# Altium PCB ONTVANGER.PcbDoc
Units mil, origin at the board's own origin, x right, y up, seen from the top; angles counter-clockwise.
Board outline 3200 x 2950 mil, 2 copper layers (Top Layer, Bottom Layer); 52 components, 46 nets, 166 pads, 12 vias.
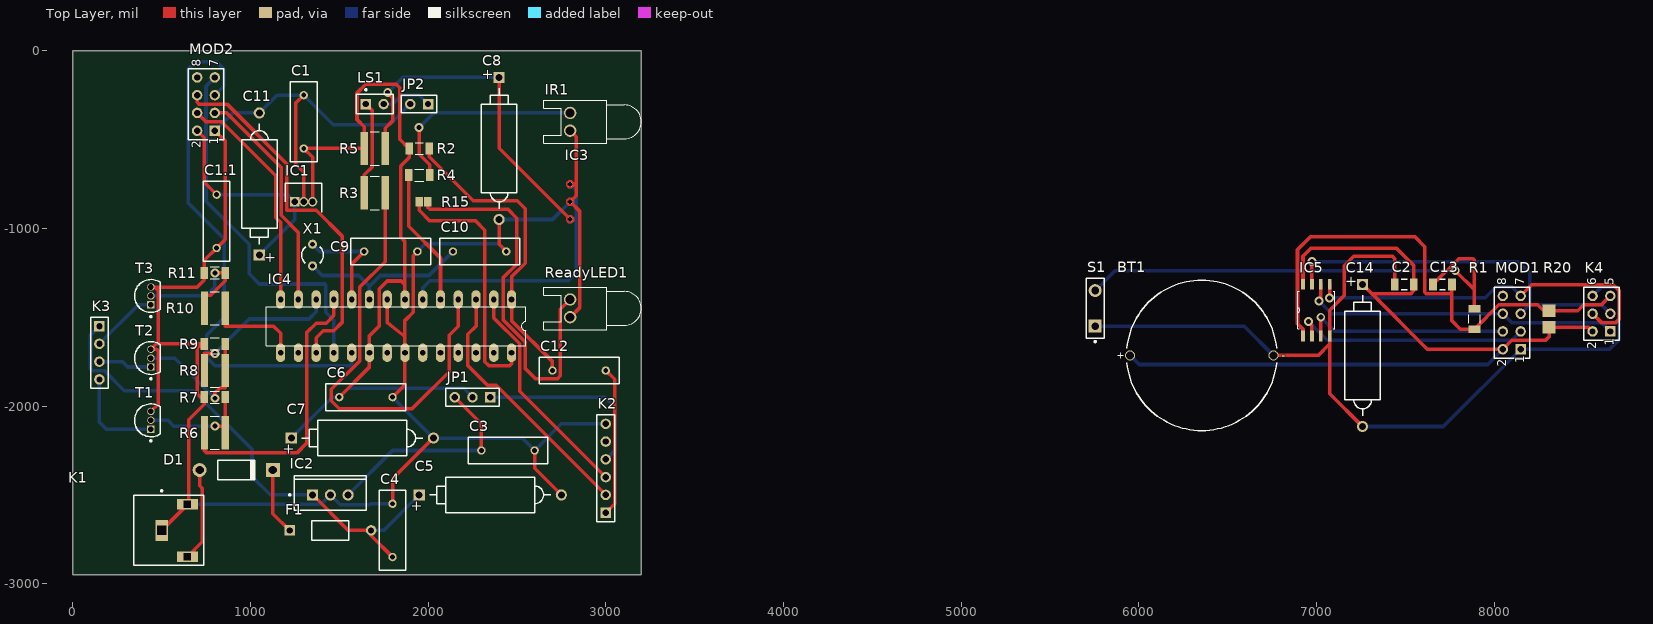
[diagram p0: Top Layer view]
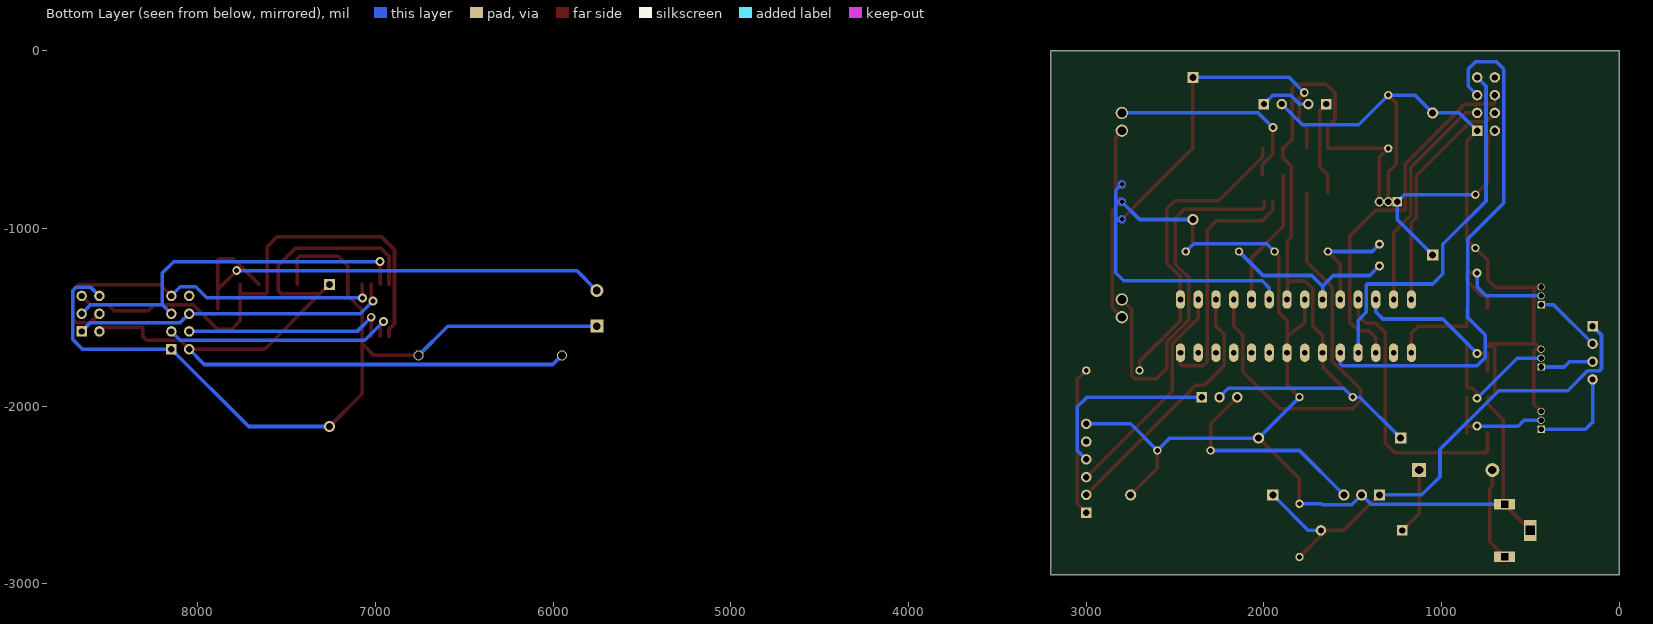
[diagram p1: Bottom Layer view, seen from below]

## Layer stack, top to bottom
Top Solder: solder mask 0.4, Solder Resist, Dk 3.5
Top Layer: signal copper 1.4
Dielectric 1: dielectric 12.6, FR-4, Dk 4.8
Bottom Layer: signal copper 1.4
Bottom Solder: solder mask 0.4, Solder Resist, Dk 3.5

## Board outline
3200,0 3200,-2950 0,-2950 0,0

## Design rules (kind name [scope] priority, off if disabled: settings)
Clearance [All] p1: gap=10 ignorepadtopadclearanceinfootprint=FALSE except(0: Arc-Hole Track-Hole SMDPad-Hole THPad-Hole Via-Hole Fill-Hole Poly-Hole Region-Hole Text-Hole)
PolygonConnect [All] p1: connectstyle=Relief reliefconductorwidth=10 reliefentries=4 polygonreliefangle="90 Angle" airgapwidth=10
RoomDefinition ZENDER [InComponentClass('ZENDER')] p1: confinementstyle=ConfineIn formatcopy=TRUE lockcomponents=FALSE outline 5695,-2160 8715,-2160 8715,-1170 5695,-1170
RoomDefinition ONTVANGER [InComponentClass('ONTVANGER')] p2: confinementstyle=ConfineIn formatcopy=TRUE lockcomponents=FALSE outline 6700,-4130 15305,-4130 15305,-2550 6700,-2550
RoutingVias [All] p1: holewidth=28 width=50 viastyle="Through Hole" minholewidth=28 minwidth=50 maxholewidth=28 maxwidth=50
SolderMaskExpansion [All] p1: expansion=4 istentingtop=FALSE
Width [All] p1: maxlimit=25 minlimit=10 preferedwidth=20 minimp=50.000000 maximp=50.000000 favimp=50.000000
30 further rules are at their usual default settings.

## Classes and differential pairs
component class ZENDER: BT1 C2 C13 C14 IC5 K4 MOD1 R1 R20 S1
component class ONTVANGER: "  " C1 C1.1 C3 C4 C5 C6 C7 C8 C9 C10 C11 C12 D1 F1 IC1 IC2 IC3 IC4 IR1 JP1 JP2 K1 K2 K3 LS1 MOD2 R2 R3 R4 R5 R6 R7 R8 R9 R10 R11 R15 ReadyLED1 T1 T2 T3 X1

## Components (designator, comment, footprint, x,y, rotation, side; value= is the part's Value field where it differs from the comment)
BT1 "CR-2032" PANA-CR-2032HFN 6355,-1715 r0 top
C1 "Cap" RAD-0.3 1300,-400 r270 top value=100n
C1.1 "Cap" RAD-0.3 810,-960 r90 top value=100n
C2 "Cap Semi" C1206 7495,-1315 r0 top value=100nF
C3 "Cap" RAD-0.3 2450,-2250 r180 top value=100n
C4 "Cap" RAD-0.3 1800,-2700 r270 top value=100n
C5 "50v" POLAR0.8 2350,-2500 r180 top value=100u
C6 "Cap" RAD-0.3 1650,-1950 r180 top value=100n
C7 "50v" POLAR0.8 1630,-2180 r180 top value=100u
C8 "50v" POLAR0.8 2400,-550 r90 top value=10u
C9 "Cap" RAD-0.3 1790,-1130 r180 top value=22pp
C10 "Cap" RAD-0.3 2290,-1130 r180 top value=22pp
C11 "50v" POLAR0.8 1050,-750 r270 top value=100u
C12 "Cap" RAD-0.3 2850,-1800 r180 top value=100n
C13 "Cap Semi" C1206 7710,-1315 r0 top value=100nF
C14 "Cap Pol2" POLAR0.8 7260,-1715 r90 top value=100nF
D1 "Diode 1N4007" DO-41 920,-2360 r0 top
F1 "500mAT" PIN-W2/E2.8 1450,-2700 r0 top
IC1 "LP2950-33LPE3" TO127P419X482X788-3P 1250,-850 r0 top
IC2 "MC7805" ONSC-TO-220-3-221AB-01 1450,-2500 r90 top
IC3 "TSOP58238" *TSOP-382_TSOP38238(Primary) 2839.37,-751.57 r270 top
IC4 "ATmega328-PU" *DIL28 1820,-1550 r270 top
IC5 "ATtiny85" *SOIC127P798X216-8N 7000,-1460 r90 top
IR1 "LED2" LED-0 2800,-400 r90 top
JP1 "K1 K2 Power select" HDR1X3 2350,-1950 r180 top
JP2 "Header 2" HDR1X2 2000,-300 r180 top
K1 "PJRAN1X1U01X" SWIT-PJRAN1X1U01X_V 500,-2700 r270 top
K2 "5V FTDI cable" HDR1X6 3000,-2600 r90 top
K3 "Header 4" HDR1X4 150,-1550 r270 top
K4 "ATMEL ISP" HDR2X3 8655,-1580 r90 top
LS1 "8 Ohm" PIN2 1650,-300 r0 top
MOD1 "NRF24L01+" HDR2X4 8150,-1680 r90 top
MOD2 "NRF24L01+" HDR2X4 800,-450 r90 top
R1 "Res2" *RESC3115X70N 7890,-1510 r90 top value=10K
R2 "Res2" *RESC3115X70N 1950,-550 r180 top locked value=10K
R3 "Res2" *RESC3146X60N 1700,-800 r0 top value=120R
R4 "Res2" *RESC3215X64N 1950,-700 r180 top value=2K7
R5 "Res2" *RESC3146X60N 1700,-550 r180 top value=120R
R6 "Res2" *RESC3146X60N 800,-2150 r180 top locked value=120R
R7 "Res2" *RESC3215X64N 800,-1950 r0 top value=12k
R8 "Res2" *RESC3146X60N 800,-1800 r180 top locked value=120R
R9 "Res2" *RESC3215X64N 800,-1650 r0 top value=12k
R10 "Res2" *RESC3146X60N 800,-1450 r0 top value=120R
R11 "Res2" *RESC3215X64N 800,-1250 r0 top value=12k
R15 "Res2" *RESC1412X64N 1973.58,-850 r180 top value=1K
R20 "Res2" *RESC3216X55N 8310,-1510 r90 top value=6k8
ReadyLED1 "LED1" LED-0 2800,-1450 r90 top
S1 "SW-PB" SPST-2 5755,-1450 r90 top
T1 "BS170" ONSC-TO-92-3-29-11 440,-2080 r90 top
T2 "BS170" ONSC-TO-92-3-29-11 440,-1730 r90 top
T3 "BS170" ONSC-TO-92-3-29-11 440,-1380 r90 top
X1 "16MHz" R38 1350,-1150 r180 top

## Footprints (in the part's own frame and the unit in brackets; to place one, negate y for a bottom-side part, rotate by r counter-clockwise, add the part's x,y. Pads: shape width x height; smd on the part's side, far side on the other; paste and mask are expansions set on the pad)
*DIL28 [mil]
  oval 104x52 hole 32: 1(-150,650) 2(-150,550) 3(-150,450) 4(-150,350) 5(-150,250) 6(-150,150) 7(-150,50) 8(-150,-50) 9(-150,-150) 10(-150,-250) 11(-150,-350) 12(-150,-450) 13(-150,-550) 14(-150,-650) 15(150,-650) 16(150,-550) 17(150,-450) 18(150,-350) 19(150,-250) 20(150,-150) 21(150,-50) 22(150,50) 23(150,150) 24(150,250) 25(150,350) 26(150,450) 27(150,550) 28(150,650)
  silkscreen extent -110,-730 110,730
*RESC1412X64N [mm]
  rect 1.06x1.42 smd: 1(-0.599,0) 2(0.599,0)
*RESC3115X70N [mm]
  rect 1.08x1.68 smd: 1(-1.445,0) 2(1.445,0)
  silkscreen extent -0.58,-0.83 0.58,0.83
*RESC3146X60N [mm]
  rect 1.05x4.77 smd: 1(-1.485,0) 2(1.485,0)
  silkscreen extent -0.64,-2.38 0.64,2.38
*RESC3215X64N [mm]
  rect 1.06x1.72 smd: 1(-1.499,0) 2(1.499,0)
  silkscreen extent -0.65,-0.85 0.65,0.85
*RESC3216X55N [mm]
  rect 1.74x1.82 smd: 1(-1.19,0) 2(1.19,0)
*SOIC127P798X216-8N [mil]
  rect 61x21 smd: 1(-146,75) 2(-146,25) 3(-146,-25) 4(-146,-75) 5(146,-75) 6(146,-25) 7(146,25) 8(146,75)
  silkscreen extent -106,-105 106,105
*TSOP-382_TSOP38238(Primary) [mm]
  round 0.7 hole 0.7: GND(2.5,-1) OUT(0,-1) VS(5,-1)
  Top Layer region: 0.568,-0.793 0.255,-0.453 -0.207,-0.432 -0.547,-0.745 -0.568,-1.207 -0.255,-1.547 0.207,-1.568 0.547,-1.255
  Top Layer region: 3.068,-0.793 2.755,-0.453 2.293,-0.432 1.953,-0.745 1.932,-1.207 2.245,-1.547 2.707,-1.568 3.047,-1.255
  Top Layer region: 5.568,-0.793 5.255,-0.453 4.793,-0.432 4.453,-0.745 4.432,-1.207 4.745,-1.547 5.207,-1.568 5.547,-1.255
  Bottom Layer region: 0.568,-0.793 0.255,-0.453 -0.207,-0.432 -0.547,-0.745 -0.568,-1.207 -0.255,-1.547 0.207,-1.568 0.547,-1.255
  Bottom Layer region: 3.068,-0.793 2.755,-0.453 2.293,-0.432 1.953,-0.745 1.932,-1.207 2.245,-1.547 2.707,-1.568 3.047,-1.255
  Bottom Layer region: 5.568,-0.793 5.255,-0.453 4.793,-0.432 4.453,-0.745 4.432,-1.207 4.745,-1.547 5.207,-1.568 5.547,-1.255
  Multi-Layer region: 0.568,-0.793 0.255,-0.453 -0.207,-0.432 -0.547,-0.745 -0.568,-1.207 -0.255,-1.547 0.207,-1.568 0.547,-1.255
  Multi-Layer region: 3.068,-0.793 2.755,-0.453 2.293,-0.432 1.953,-0.745 1.932,-1.207 2.245,-1.547 2.707,-1.568 3.047,-1.255
  Multi-Layer region: 5.568,-0.793 5.255,-0.453 4.793,-0.432 4.453,-0.745 4.432,-1.207 4.745,-1.547 5.207,-1.568 5.547,-1.255
C1206 [mm] "Chip Capacitor, Body 3.2x1.6mm, IPC High Density"
  rect 1.1x1.7 smd: 1(-1.35,0) 2(1.35,0)
  silkscreen extent -0.4,-0.75 0.4,0.75, body extent -1.7,-0.9 1.7,0.9, height 1.3
DO-41 [mm] "Diode, Axial; Body 5.2 x 2.7 mm (LxDia. max), Lead Dia. 0.86 mm (max)"
  round 2 hole 1.2: 1(-5.23,0)
  rect 2x2 hole 1.2: 2(5.23,0)
  silkscreen extent -2.65,-1.4 2.75,1.4
HDR1X2 [mm] "Connector; Header; 2 Position"
  rect 1.5x1.5 hole 0.9: 1(0,0)
  round 1.5 hole 0.9: 2(2.54,0)
  silkscreen extent -1.27,-1.27 3.81,1.27
HDR1X3 [mm] "Connector; Header; 3 Position"
  rect 1.5x1.5 hole 0.9: 1(0,0)
  round 1.5 hole 0.9: 2(2.54,0) 3(5.08,0)
  silkscreen extent -1.27,-1.27 6.35,1.27
HDR1X4 [mm] "Connector; Header; 4 Position"
  rect 1.5x1.5 hole 0.9: 1(0,0)
  round 1.5 hole 0.9: 2(2.54,0) 3(5.08,0) 4(7.62,0)
  silkscreen extent -1.27,-1.27 8.89,1.27
HDR1X6 [mm] "Connector; Header; 6 Position"
  rect 1.5x1.5 hole 0.9: 1(0,0)
  round 1.5 hole 0.9: 2(2.54,0) 3(5.08,0) 4(7.62,0) 5(10.16,0) 6(12.7,0)
  silkscreen extent -1.27,-1.27 13.97,1.27
HDR2X3 [mm] "Connector; Header; 3x2 Position"
  rect 1.5x1.5 hole 0.9: 1(0,0)
  round 1.5 hole 0.9: 2(0,2.54) 3(2.54,0) 4(2.54,2.54) 5(5.08,0) 6(5.08,2.54)
  silkscreen extent -1.27,-1.27 6.35,3.81
HDR2X4 [mm] "Connector; Header; 4x2 Position"
  rect 1.5x1.5 hole 0.9: 1(0,0)
  round 1.5 hole 0.9: 2(0,2.54) 3(2.54,0) 4(2.54,2.54) 5(5.08,0) 6(5.08,2.54) 7(7.62,0) 8(7.62,2.54)
  silkscreen extent -1.27,-1.27 8.89,3.81
LED-0 [mil] "LED; 2 Leads"
  round 70 hole 50: 1(50,0) 2(-50,0)
  silkscreen extent -120,-400 120,150
ONSC-TO-92-3-29-11 [mm] "TO, 3-Leads, Body Dia 4.7mm, Pitch 1.27mm"
  rect 1.05x1.05 hole 0.8: 1(-1.27,0)
  round 1.05 hole 0.8: 2(0,0) 3(1.27,0)
  silkscreen extent -3.07,-1.34 2.35,2.35, body extent -2.35,-1.33 2.36,2.36, height 7.87
ONSC-TO-220-3-221AB-01 [mm] "FM, 3-Leads, Body 10.3x4.85mm, Pitch 2.54mm"
  rect 1.6x1.6 hole 1: 1(0,2.54)
  round 1.6 hole 1: 2(0,0) 3(0,-2.54)
  silkscreen extent -2.19,-5.15 2.72,5.92, body extent -2.16,-5.15 2.69,5.15, height 19.68
PANA-CR-2032HFN [mm] "TH, 2-Leads, Dia 21.5mm"
  round 1.45 hole 1.1: 1(-10.25,0) 2(10.25,0)
  silkscreen extent -10.7,-10.75 10.7,10.75, body extent -10.75,-10.75 10.75,10.75, height 9.9
PIN2 [mm] "Photosensitive Diode; 2 Leads"
  rect 1.5x1.5 hole 0.9: 1(0,0)
  round 1.5 hole 0.9: 2(2.54,0)
  silkscreen extent -1.4,-1.4 3.94,2.17
PIN-W2/E2.8 [mm] "Thru-Hole; 2 Leads"
  rect 1.5x1.5 hole 0.9: 1(-5.825,0)
  round 1.5 hole 0.9: 2(5.825,0)
  silkscreen extent -2.65,-1.4 2.65,1.4
POLAR0.8 [mm] "Polarized Capacitor; 2 Leads"
  rect 1.6x1.6 hole 1: 1(10.16,0)
  round 1.6 hole 1: 2(-10.16,0)
  silkscreen extent -8.64,-2.54 8.64,2.54
R38 [mm] "Crystal, Thru-Hole; 2 Leads; Body 3.1 x 8.2 mm (Dia.xH)"
  round 1.3 hole 0.7: 1(0,1.55) 2(0,-1.55)
  silkscreen extent -1.55,-1.19 1.55,1.17
RAD-0.3 [mm] "Radial Cap, Thru-Hole; 2 Leads; 0.3 in Pin Spacing"
  round 1.2 hole 0.7: 1(-3.81,0) 2(3.81,0)
  silkscreen extent -5.71,-1.91 5.71,1.91
SPST-2 [mm] "Switch; 2 Leads"
  rect 1.85x1.85 hole 1.1: 1(-2.54,0)
  round 1.85 hole 1.1: 2(2.54,0)
  silkscreen extent -4.89,-1.27 4.28,1.27
SWIT-PJRAN1X1U01X_V [mm] "Jack, 3-Leads, Body 19.5x10mm"
  rect 3x1.8 hole 1.3 square paste-1: 1(0,0)
  rect 1.5x3 hole 1 square paste-1: 2(-3.75,3.7) 3(3.75,3.7)
  silkscreen extent -5.77,-4 5,6, body extent -5,-13.5 5,6, height 13
TO127P419X482X788-3P [mm]
  rect 1.35x1.35 hole 0.9: 1(0,0)
  round 1.35 hole 0.9: 2(1.27,0) 3(2.54,0)
  silkscreen extent -1.34,-1.52 3.88,2.67, body extent -1.14,-1.52 3.68,2.67, height 7.37

## Part data
BT1: library part CMP-2000-05296-1, "Coin Cell Battery, 225 mAh, 0.2 mA, 3 V, -30 to 60 degC, Bulk", Battery Capacity=220mAh, Battery Voltage=3V, Manufacturer=Panasonic, Battery IEC Code=CR2032, Battery NEDA Code=5004LC, Battery Size Code=2032, Battery Technology=LithiumManganeseDioxide, Battery Terminals=PCBPins, Datasheet URL=https://datasheet.ciiva.com/3/aaa4000de87-3072.pdf, Datasheet Version="Rev. 0, 05/2010", External Depth=-, External Diameter=20mm, External Height=3.2mm, External Width=-, Manufacturer URL=http://www.panasonic.com/, Product Range=-, SVHC=1,2-dimethoxyethane,ethyleneglycoldimethylether(EGDME)(15-Jun-2015), Weight=2.9g
C1 C1.1 C3 C4 C6 C9 C10 C12: "Capacitor", LatestRevisionDate=17-Jul-2002, LatestRevisionNote="Re-released for DXP Platform.", PackageDescription="Radial Cap, Thru-Hole; 2 Leads; 0.3 in Pin Spacing", PackageReference=RAD-0.3, Published=8-Jun-2000, Publisher="Altium Limited"
C2 C13: "Capacitor (Semiconductor SIM Model)", LatestRevisionDate=29-May-2009, LatestRevisionNote="IPC-7351 Footprint Added.", PackageDescription="Chip Capacitor", PackageReference=C1206, Published=8-Jun-2000, Publisher="Altium Limited"
C5 C7 C8 C11: library part "Cap Pol2", "Polarized Capacitor (Axial)", LatestRevisionDate=17-Jul-2002, LatestRevisionNote="Re-released for DXP Platform.", PackageDescription="Polarized Capacitor; 2 Leads", PackageReference=POLAR0.8, Published=8-Jun-2000, Publisher="Altium Limited"
C14: "Polarized Capacitor (Axial)", LatestRevisionDate=17-Jul-2002, LatestRevisionNote="Re-released for DXP Platform.", PackageDescription="Polarized Capacitor; 2 Leads", PackageReference=POLAR0.8, Published=8-Jun-2000, Publisher="Altium Limited"
D1: "1 Amp General Purpose Rectifier", Code_JEDEC=DO-204-AL, ComponentLink1Description="Manufacturer Link", ComponentLink1URL=http://www.fairchildsemi.com/, ComponentLink2Description=Datasheet, ComponentLink2URL=http://www.fairchildsemi.com/ds/1N%2F1N4001.pdf, DatasheetVersion=1998, LatestRevisionDate=17-Jul-2002, LatestRevisionNote="Re-released for DXP Platform.", PackageDescription="Diode, Axial; Body 5.2 x 2.7 mm (LxDia. max), Lead Dia. 0.86 mm (max)", PackageReference=DO-41, PackageVersion=Aug-1999, Published=8-Jun-2000, Publisher="Altium Limited"
F1: library part "Fuse 1", "Fuse", LatestRevisionDate=17-Jul-2002, LatestRevisionNote="Re-released for DXP Platform.", PackageDescription="Thru-Hole; 2 Leads", PackageReference=PIN-W2/E2.8, Published=8-Jun-2000, Publisher="Altium Limited"
IC1: "Integrated Circuit", Manufacturer_Name="Texas Instruments", Mouser Part Number=595-LP2950-33LPE3, RS Part Number=7620430P, Datasheet Link=http://www.ti.com/lit/gpn/lp2950, Height=4.19mm, Manufacturer_Part_Number=LP2950-33LPE3, Mouser Price/Stock=https://www.mouser.com/Search/Refine.aspx?Keyword=595-LP2950-33LPE3, RS Price/Stock=http://uk.rs-online.com/web/p/products/7620430P
IC2: library part CMP-2000-04928-1, "Positive Voltage Regulator, 1 A, 5 V, 0 to 125 degC, 3-Pin TO-220, RoHS, Tube", Current, Output, Maximum=1A, Current, Quiescent Supply=6.5mA, Current, Supply=3.2mA, Dropout Voltage=2V, Manufacturer="ON Semiconductor", Package Description="3-Pin Flange Mount, Vertical Straight Lead, Body 9.97 x 4.445 mm, Pitch 2.54 mm", Package Reference=TO-220-3-221AB-01, Package Type=TO-220, Package Version="Rev. A, 11/2010", Resistance, Thermal, Junction to Case=5degC/W, Temperature, Operating, Maximum=+125degC, Temperature, Operating, Minimum=0degC, Temperature, Operating, Range=0to+125degC, Voltage, Input Range=Maximumof35V, Voltage, Input, High Level=35V, Voltage, Noise=10μV/V, Voltage, Output=5V, Datasheet URL=http://www.onsemi.com/pub_link/Collateral/MC7800-D.PDF, Datasheet Version="Rev. 27, 11/2014", Dimensions=10.28x4.82x15.75mm, Dropout Voltage Measurement Current=1A, Height=15.75mm, Length=10.28mm, Line Regulation=20mV, Load Regulation=25mV, Manufacturer URL=http://www.onsemi.com/, Mounting Type=ThroughHole, Number of Outputs=1, Number of Pins=3, Output Type=Fixed, Polarity=Positive, Regulation, Line=0.5mV, Regulation, Load=1.3mV, Regulator Function=Standard, Regulator Type=PositiveVoltageOut, Type=VoltageRegulator, Voltage, Dropout=2V, Voltage, Supply=35V, Width=4.82mm
IC3: library part CMP-1666-00022-1, "IR Receiver Modules for Remote Control System, 2.5 to 5.5 V, -25 to 85 degC, 3-Pin THD, RoHS, Bulk", Capacitance="1.8E-11 f", Frequency="24 MHz", Frequency Tolerance=30ppm, Load Capacitance="18 pF", Manufacturer=Vishay, Max Operating Temperature=70degC, Max Supply Voltage=5.5V, Min Operating Temperature=-20degC, Min Supply Voltage=2.5V, Nominal Supply Current=700uA, Package Quantity=1000, Resistance="40 Ohm", Category=Diodes, ComponentLink1Description="Manufacturer URL", ComponentLink1URL=http://www.vishay.com/, ComponentLink2Description=Datasheet, ComponentLink2URL=http://www.vishay.com/docs/82491/tsop382.pdf, ComponentLink3Description=https://datasheet.ciiva.com/15272/tsop582-15272159.pdf?src-supplier=Arrow+Europe, ComponentLink3URL=https://datasheet.ciiva.com/15272/tsop582-15272159.pdf?src-supplier=Arrow+Europe, ComponentLink4Description=https://datasheet.ciiva.com/8078/tsop582-8078165.pdf?src-supplier=Element14, ComponentLink4URL=https://datasheet.ciiva.com/8078/tsop582-8078165.pdf?src-supplier=Element14, ComponentLink5Description=https://datasheet.ciiva.com/8084/tsop582-8084506.pdf?src-supplier=Avnet, ComponentLink5URL=https://datasheet.ciiva.com/8084/tsop582-8084506.pdf?src-supplier=Avnet, ComponentLink6Description=https://datasheet.ciiva.com/29167/geninfo-29167706.pdf?src-supplier=Digi-Key, ComponentLink6URL=https://datasheet.ciiva.com/29167/geninfo-29167706.pdf?src-supplier=Digi-Key, DatasheetVersion="Rev. 1.5, 07/2016", ESR="40 Ohm", Height="0.041 inch", Lead Free="Lead Free", Length="0.197 inch", Manufacturer Part Number=TSOP58238, Mount="Surface Mount", Number of Pins=3, Operating Supply Current=700uA, Orientation="Side View", PackageDescription="3-Pin Through Hole Device, Body 5.00 x 4.80 mm, Pitch 2.54 mm", PackageReference=VISH-TSOP38238, Packaging="Tape and Reel", Pins=4, Pricing 1="1=0,95000, 10=0,83700, 25=0,75600, 100=0,66150, 250=0,58052, 500=0,51300, 1000=0,40500, 5000=0,35910, 10000=0,34425 (USD)", REACH SVHC="No SVHC", RoHS=Yes, RoHSCompliant=True, Sensing Distance=40m, Stock 1=1485, Supplier 1=Digi-Key, Tolerance=30ppm, Width="0.126 inch"
IC4: library part CMP-0095-00015-2, "8-bit AVR Microcontroller, 32KB Flash, 1KB EEPROM, 2KB SRAM, 28-pin PDIP, Industrial Grade (-40°C to 85°C)", Manufacturer="Microchip / Atmel", Manufacturer Part Number=ATMEGA328-PU, ComponentLink1Description="Manufacturer URL", ComponentLink1URL=http://www.atmel.com/, ComponentLink2Description="ATmega48A/48PA/88A/88PA/168A/168PA/328/328P Datasheet", ComponentLink2URL=http://www.atmel.com/dyn/resources/prod_documents/8271.pdf, ComponentLink3Description="ATmega48A/48PA/88A/88PA/168A/168PA/328/328P Summary", ComponentLink3URL=http://www.atmel.com/dyn/resources/prod_documents/8271S.pdf, DatasheetVersion="revD, May-2011", PackageDescription="28-lead (0.300\"/7.62mm Wide) Plastic Dual Inline Package (PDIP)", PackageReference=28P3, PackageVersion="revB, Sep-2001", RevisionNote="DatasheetVersion updated. URLs added."
IC5: library part CMP-0093-00032-2, "8-bit AVR Microcontroller, 20MHz, 2.7-5.5V, 8K Flash, 512 Bytes EEPROM, 512 Bytes SRAM, Industrial Grade (-40°C to 85°C), 8-Lead PDIP, Pb-Free", Manufacturer="Microchip / Atmel", Manufacturer Part Number=ATTINY85-20PU, Code_JEDEC=MS-001-BA, ComponentLink1Description="Manufacturer URL", ComponentLink1URL=http://www.atmel.com/, ComponentLink2Description="ATtiny25/45/85 Datasheet", ComponentLink2URL=http://www.atmel.com/dyn/resources/prod_documents/doc2586.pdf, ComponentLink3Description="ATtiny25/45/85 Summary", ComponentLink3URL=http://www.atmel.com/dyn/resources/prod_documents/2586S.pdf, DatasheetVersion="revN, Apr-2011", PackageDescription="8-Lead, 0.300\" Wide Body, Plastic Dual In-Line Package (PDIP)", PackageReference=8P3, PackageVersion="revB, Jan-2002", RevisionNote="DatasheetVersion updated. URLs added."
IR1 ReadyLED1: library part LED0, "Typical INFRARED GaAs LED", LatestRevisionDate=08-Jul-2005, LatestRevisionNote="Mech Layer 1 removed.", PackageDescription="LED; 2 Leads", PackageReference=LED-0, Published=8-Jun-2000, Publisher="Altium Limited"
JP1: library part "Header 3", "Header, 3-Pin", LatestRevisionDate=17-Jul-2002, LatestRevisionNote="Re-released for DXP Platform.", Publisher="Altium Limited"
JP2: "Header, 2-Pin", LatestRevisionDate=17-Jul-2002, LatestRevisionNote="Re-released for DXP Platform.", Publisher="Altium Limited"
K1: library part CMP-1772-00003-1, "Female Phono Jack, 3 Position, Height 13 mm, Tail Length 4 mm, RoHS, Bulk", Capacitance="100 nF", Case\Package=Radial, Max Operating Temperature="125 degC", Min Operating Temperature="-55 degC", Package Quantity=500, Tolerance=10%, Type (Capacitors)=X7R, Voltage Rating="50 V", ComponentLink1Description="Manufacturer URL", ComponentLink1URL=http://www.switchcraft.com/, ComponentLink2Description=Datasheet, ComponentLink2URL=http://www.conxall.com/Drawings/pjran1x1u__x_series_cd.pdf, DatasheetVersion="Rev. A, 01/2006", Height="3.18 mm", Lead Pitch="2.54 mm", Length="6.6 mm", Mount="Through Hole", PackageDescription="Female Phono Jack, 3 Position, Height 13 mm, Tail Length 4 mm", PackageReference=PJRAN1X1U01X, Packaging=Bulk, Pins=2, Radiation Hardening=No, REACH SVHC="No SVHC", RoHSCompliant=true, Voltage Rating (DC)="50 V", Width="5.08 mm"
K2: library part "Header 6", "Header, 6-Pin", LatestRevisionDate=17-Jul-2002, LatestRevisionNote="Re-released for DXP Platform.", Publisher="Altium Limited"
K3: "Header, 4-Pin", LatestRevisionDate=17-Jul-2002, LatestRevisionNote="Re-released for DXP Platform.", Publisher="Altium Limited"
K4: library part "Header 3X2", "Header, 3-Pin, Dual row", LatestRevisionDate=17-Jul-2002, LatestRevisionNote="Re-released for DXP Platform.", Publisher="Altium Limited"
LS1: library part Speaker, "Loudspeaker", LatestRevisionDate=17-Jul-2002, LatestRevisionNote="Re-released for DXP Platform.", PackageReference=PIN2, Published=24-Mar-1999, Publisher="Altium Limited"
MOD1 MOD2: library part "Header 4X2", "Header, 4-Pin, Dual row", LatestRevisionDate=17-Jul-2002, LatestRevisionNote="Re-released for DXP Platform.", Publisher="Altium Limited"
R1 R2 R3 R4 R5 R6 R7 R8 R9 R10 R11 R15 R20: "Resistor", LatestRevisionDate=17-Jul-2002, LatestRevisionNote="Re-released for DXP Platform.", PackageDescription="Axial Device, Thru-Hole; 2 Leads; 0.4 in Pin Spacing", PackageReference=AXIAL-0.4, Published=8-Jun-2000, Publisher="Altium Limited"
S1: "Switch", LatestRevisionDate=17-Jul-2002, LatestRevisionNote="Re-released for DXP Platform.", PackageDescription="Switch; 2 Leads", PackageReference=SPST-2, Published=24-Mar-1999, Publisher="Altium Limited"
T1 T2 T3: library part CMP-1058-00929-1, "Small Signal MOSFET, 500 mA, 60 V, N-Channel, 3-Pin TO-92, Bulk Box", Manufacturer="On Semiconductor", Package Type=TO-92, Channel Polarity="N Channel", ComponentLink1Description="Manufacturer URL", ComponentLink1URL=http://www.onsemi.com/, ComponentLink2Description=Datasheet, ComponentLink2URL=http://www.onsemi.com/pub_link/Collateral/BS170-D.PDF, ComponentLink3Description="Package Specification", ComponentLink3URL=http://www.onsemi.cn/pub_link/Collateral/2N6426-D.PDF, Configuration=Single, DatasheetVersion="Rev. 6", ID Max (A)=0.5, Mounting Technology="Through Hole", PackageDescription="3-Pin Transistor Outline, Body 4.825 x 3.685 mm, Pitch 1.27 mm", PackageReference=TO-92-3-29-11_AM_SL, PackageVersion="Rev. AM", Packing="Bulk Box", PartNumber=BS170, PD Max (W)=0.35, V(BR)DSS Min (V)=60, VGS Max (V)=20, VGS(th) Max (V)=3
X1: library part XTAL, "RALTRON - AS-16.000-18 - CRYSTAL, 16MHZ, 18PF, HC-49S", ESR (Equivalent Series Resistance)=40R, Frequency Stability=50ppm, Load Capacitance=18pF, Manufacturer="Raltron Electronics", Manufacturer Part Number=AS-16.000-18, Max Operating Temperature=70°C, Min Operating Temperature=-20°C, Category=Crystals, ComponentLink1Description=https://datasheet.ciiva.com/46643/70417478-46643322.pdf?src-supplier=Allied+Electronics, ComponentLink1URL=https://datasheet.ciiva.com/46643/70417478-46643322.pdf?src-supplier=Allied+Electronics, Frequency=16MHz, Frequency Tolerance=50ppm, Height=3.5mm, LatestRevisionDate=17-Jul-2002, LatestRevisionNote="Re-released for DXP Platform.", Length=11.35mm, Mount="Through Hole", Number of Pins=2, PackageDescription="Crystal, Thru-Hole; 2 Leads; Body 3.1 x 8.2 mm (Dia.xH)", PackageReference=R38, Pricing 1="1=0,66000, 10=0,55000, 50=0,49500, 100=0,44000, 500=0,41800, 1000=0,35200, 2500=0,33000, 5000=0,31900, 10000=0,30800 (USD)", Published=8-Jun-2000, Publisher="Altium Limited", REACH SVHC="No SVHC", RoHS=Yes, Series Resistance=40R, Stock 1=1917, Supplier 1=Digi-Key, Width=5mm

## Via types
v1: diameter 50, hole 28, Top Layer to Bottom Layer, 12 vias

## Nets (pads, with @x,y where several pads share a name; then routed paths per layer and width w, separated by ;. In a path a pad name is that pad's centre, name@x,y a point inside that pad or via, vN(x,y) a via of type N, cw(c..) or ccw(c..) an arc to the next point about the centre after c; other vN are vias at no path point)
12V: C4.2 C5.1 F1.2 IC2.1 K3.1 | length 2860.7
  Top Layer w20: IC2.1 1550,-2700 F1.2 1679.33,-2729.33 C4.2
  Bottom Layer w20: K3.1 100,-1600 100,-1790 110,-1800 177,-1800 290,-1913 679,-1913 1009,-2243 1009,-2397 1112,-2500 IC2.1 ; F1.2 1750,-2700 C5.1
+3V3: C1.1.2 C11.1 IC1.1 MOD2.2 | length 1245
  Top Layer w20: MOD2.2 740,-490 740,-740 C1.1.2
  Bottom Layer w20: C1.1.2 1210,-810 IC1.1 1250,-950 C11.1
+5V: C1.2 C6.2 C7.1 IC1.3 IC4.7 IC4.20 JP1.2 R2.2 R5.2 | length 4534.7
  Top Layer w20: IC1.3 1350,-600 C1.2 R5.2 1641.54,-428.54 1600,-387 1600,-238 1650,-188 1820,-188 1841,-209 1841,-497.89 R2.2 1893.11,-602 1846,-649.11 1846,-1050 1870,-1074 1870,-1316 ; C6.2 1670,-1780 IC4.20 1670,-1604 1724,-1550 1724,-1342 1770,-1296 1850,-1296 1870,-1316 ; IC4.7 1870,-1316
  Bottom Layer w20: C7.1 1460,-1950 C6.2 1550,-1900 2200,-1900 JP1.2
GND: C1.1 C1.1.1 C3.1 C4.1 C5.2 C6.1 C7.2 C8.2 C9.1 C10.1 C11.2 IC1.2 IC2.2 IC3.GND IC4.8 IC4.22 IR1.2 JP2.2 K1.1 K1.2 K2.6 MOD2.1 R7.1 R9.1 R11.1 ReadyLED1.2 T1.3 T2.3 T3.3 | length 12232.8
  Top Layer w20: T1.3 481,-1989 481,-1690 471,-1680 T2.3 470,-1650 ; T3.3 461,-1330 ; K1.1 645.67,-2554.33 K1.2 653,-2552.36 653,-2076.98 740.98,-1989 R7.1 720,-1950 700,-1930 700,-1673 710,-1663 740.98,-1663 R9.1 470,-1650 ; MOD2.1 858,-508 858,-1062 C1.1.1 740.98,-1179.02 R11.1 740.98,-1290 700.98,-1330 461,-1330 ; IC1.2 1300,-682.5 1256,-638.5 1256,-294 C1.1 ; IC4.8 1770,-1530 1870,-1610 ; C4.1 1800,-2410 C7.2 ; C6.1 1870,-1880 IC4.22 1870,-1610 ; C9.1 1916,-1154 1916,-1472 1870,-1518 1870,-1610 ; C8.2 2400,-1090 C10.1 ; C3.1 2600,-2350 C5.2 ; ReadyLED1.2 2855,-1445 2855,-905 IC3.GND 2834,-816 2834,-484 IR1.2 ; 461,-1330 481,-1350 481,-1639 470,-1650
  Bottom Layer w20: K1.2 1397.64,-2552.36 IC2.2 1506,-2556 1672,-2556 1678,-2550 C4.1 ; MOD2.1 900,-350 C11.2 1150,-250 C1.1 1466,-416 1784,-416 JP2.2 ; C6.1 C7.2 2530,-2180 C3.1 2750,-2100 K2.6 ; C9.1 1984,-1086 2396,-1086 C10.1 ; C8.2 2700,-950 IC3.GND
NetBT1_1: BT1.1 C2.2 C14.1 IC5.8 K4.2 MOD1.2 R20.1 | length 4915.7
  Top Layer w20: IC5.8 6925,-1157 6970,-1112 7451.15,-1112 7548.15,-1209 C2.2 7548.15,-1350.85 7530,-1369 7314,-1369 ; C14.1 7314,-1369 ; K4.2 8531.85,-1556.85 R20.1 8310,-1610 8290,-1630 8100,-1630 MOD1.2 7625,-1680 7314,-1369
  Bottom Layer w20: BT1.1 6002.46,-1766 7964,-1766 MOD1.2
NetBT1_2: BT1.2 C2.1 C14.2 IC5.4 K4.6 MOD1.1 S1.1 | length 4990
  Top Layer w20: BT1.2 7010,-1715 7075,-1650 ; C14.2 7075,-1930 7075,-1650 ; C2.1 7441.85,-1170 7428.85,-1157 7210,-1157 7157,-1210 7157,-1378 7075,-1460 IC5.4 7075,-1650
  Bottom Layer w20: S1.1 6593.54,-1550 BT1.2 ; C14.2 7715,-2115 MOD1.1 8650,-1680 8705,-1625 8705,-1350 8685,-1330 8605,-1330 K4.6
NetC3_2: C3.2 IC2.3 JP1.3 | length 1215.7
  Top Layer w20: JP1.3 2300,-2100 C3.2
  Bottom Layer w20: IC2.3 1800,-2250 C3.2
NetC8_1: C8.1 IC3.VS R5.1 | length 1969.1
  Top Layer w20: R5.1 1758.46,-436.54 1800,-395 1800,-263 v1(1773,-236) ; C8.1 2400,-548.42 IC3.VS
  Bottom Layer w20: v1(1773,-236) 1859,-150 C8.1
NetC9_2: C9.2 IC4.10 X1.2 | length 606
  Top Layer w20: IC4.10 1570,-1200 C9.2
  Bottom Layer w20: X1.2 1391.02,-1130 C9.2
NetC10_2: C10.2 IC4.9 X1.1 | length 993
  Bottom Layer w20: X1.1 1403.98,-1265 1610,-1265 1670,-1325 ; IC4.9 1670,-1325 ; C10.2 2005,-1265 1730,-1265 1670,-1325
NetC12_1: C12.1 K2.1 | length 841.4
  Top Layer w20: K2.1 3050,-2550 3050,-1850 C12.1
NetC12_2: C12.2 IC4.1 R2.1 | length 1745.6
  Top Layer w20: R2.1 2006.89,-596.89 2255,-845 2502,-845 2547,-890 2547,-1196 2470,-1273 IC4.1 2470,-1519 2700,-1749 C12.2
NetC13_1: C13.1 R1.2 S1.2 | length 2797.5
  Top Layer w20: C13.1 7801.85,-1170 7881.55,-1170 7890,-1178.45 7890,-1346 ; v1(7782,-1238) 7890,-1346 ; R1.2 7890,-1346
  Bottom Layer w20: S1.2 5867,-1238 v1(7782,-1238)
NetC13_2: C13.2 IC5.1 K4.5 R1.1 R20.2 | length 2908.4
  Top Layer w20: IC5.1 6925,-1568 6894,-1537 6894,-1121 6969,-1046 7553,-1046 7610,-1103 7610,-1359 7620,-1369 7750,-1369 7763.15,-1355.85 ; C13.2 7763.15,-1355.85 ; K4.5 8605,-1430 8505,-1430 8471.85,-1463.15 R20.2 8280.15,-1463.15 8247,-1430 8026.89,-1430 R1.1 7810,-1566.89 7763.15,-1520.04 7763.15,-1355.85
NetD1_1: D1.1 K1.3 | length 528.3
  Top Layer w20: K1.3 729,-2764.31 729,-2464 714.09,-2449.09 D1.1
NetD1_2: D1.2 F1.1 | length 379.3
  Top Layer w20: D1.2 1125.91,-2605.24 F1.1
NetIC3_OUT: IC3.OUT IC4.6 | length 1476.7
  Bottom Layer w20: IC4.6 1970,-1335 2010,-1295 2789,-1295 2834,-1250 2834,-785.57 IC3.OUT
NetIC4_2: IC4.2 K2.3 | length 1261
  Top Layer w20: IC4.2 2370,-1504 2516,-1650 2516,-1916 K2.3
NetIC4_3: IC4.3 K2.2 | length 1468.6
  Top Layer w20: IC4.3 2270,-1550 2224,-1596 2224,-1772 2335,-1883 2383,-1883 K2.2
NetIC4_4: IC4.4 R3.2 | length 2490.6
  Top Layer w20: R3.2 1758.46,-1187.54 1616,-1330 1616,-1746 1456,-1906 1456,-1970 1501,-2015 1910,-2015 2119,-1806 2119,-1601 2170,-1550 IC4.4
NetIC4_5: IC4.5 R4.2 | length 774.2
  Top Layer w20: R4.2 1890.98,-988 2070,-1167.02 IC4.5
NetIC4_11: IC4.11 R6.2 | length 1609.8
  Top Layer w20: R6.2 741.54,-2250 755.54,-2264 1262,-2264 1316,-2210 1316,-1587 1370,-1533 1427,-1533 1470,-1490 IC4.11
NetIC4_12: IC4.12 R8.2 | length 891.4
  Top Layer w20: R8.2 741.54,-1704 v1(800,-1704)
  Bottom Layer w20: v1(800,-1704) 994,-1510 1330,-1510 1370,-1470 IC4.12
NetIC4_13: IC4.13 MOD2.3 | length 1283.5
  Top Layer w20: MOD2.3 866.27,-350 1173.42,-657.16 1173.42,-926.58 1270,-1023.15 IC4.13
NetIC4_14: IC4.14 MOD2.4 | length 1297.1
  Top Layer w20: MOD2.4 750,-400 839.53,-400 1143.42,-703.9 1143.42,-939.42 1170,-966 IC4.14
NetIC4_15: IC4.15 R10.2 | length 538.1
  Top Layer w20: R10.2 858.46,-1550 1130,-1550 1170,-1590 IC4.15
NetIC4_17: IC4.17 MOD2.6 | length 2073.8
  Top Layer w20: MOD2.6 700,-290 710,-300 868,-300 1203.42,-635.42 1203.42,-897 1370,-897 1516,-1043 1516,-1530 1470,-1576 1410,-1576 1370,-1616 IC4.17
NetIC4_18: IC4.18 MOD2.7 | length 2084.5
  Bottom Layer w20: MOD2.7 750,-200 750,-847 993,-1090 993,-1256 1050,-1313 1418,-1313 1424,-1319 1424,-1472 1470,-1518 IC4.18
NetIC4_19: IC4.19 MOD2.5 | length 3050.1
  Bottom Layer w20: MOD2.5 850,-200 850,-103 810,-63 690,-63 650,-103 650,-857 854,-1061 854,-1501 755,-1600 755,-1727 800,-1772 1560,-1772 1570,-1762 IC4.19
NetIC4_28: IC4.28 R15.2 | length 1429.6
  Top Layer w20: R15.2 1950,-898 2010,-958 2268,-958 2320,-1010 2320,-1750 2342,-1772 2460,-1772 2470,-1762 IC4.28
NetIC5_2: IC5.2 MOD1.3 | length 1351.3
  Top Layer w20: v1(6955,-1523) 6975,-1543 IC5.2
  Bottom Layer w20: v1(6955,-1523) 7062,-1630 8100,-1630 MOD1.3
NetIC5_3: IC5.3 MOD1.4 | length 1164.1
  Top Layer w20: IC5.3 v1(7025,-1500)
  Bottom Layer w20: v1(7025,-1500) 7105,-1580 MOD1.4
NetIC5_5: IC5.5 K4.4 MOD1.7 | length 2132.6
  Top Layer w20: v1(7075,-1391) IC5.5 ; MOD1.7 8213,-1317 8672,-1317 8705,-1350 8705,-1510 8685,-1530 8605,-1530 K4.4
  Bottom Layer w20: v1(7075,-1391) 7950,-1391 8012,-1329 8099,-1329 MOD1.7
NetIC5_6: IC5.6 K4.1 MOD1.6 | length 1810.8
  Top Layer w20: v1(7014,-1408) 7025,-1397 IC5.6
  Bottom Layer w20: v1(7014,-1408) 7086,-1480 MOD1.6 8100,-1530 8605,-1530 K4.1
NetIC5_7: IC5.7 K4.3 MOD1.5 | length 2104.5
  Top Layer w20: IC5.7 v1(6975,-1187)
  Bottom Layer w20: v1(6975,-1187) 8137,-1187 8200,-1250 8200,-1430 ; MOD1.5 8200,-1430 ; K4.3 8605,-1430 8200,-1430
NetIR1_1: IR1.1 R4.1 | length 1176.4
  Top Layer w20: v1(1950,-432) 1950,-582.98 2009.02,-642 R4.1
  Bottom Layer w20: v1(1950,-432) 2032,-350 IR1.1
NetJP1_1: JP1.1 K2.4 | length 1039.1
  Bottom Layer w20: JP1.1 2996,-1950 3050,-2004 3050,-2250 K2.4
NetJP2_1: JP2.1 LS1.2 | length 291.4
  Bottom Layer w20: LS1.2 1800,-300 1850,-250 1950,-250 JP2.1
NetK3_2: K3.2 T3.1 | length 381.1
  Bottom Layer w20: K3.2 370,-1430 T3.1
NetK3_3: K3.3 T2.1 | length 302.4
  Bottom Layer w20: K3.3 280,-1750 310,-1780 T2.1
NetK3_4: K3.4 T1.1 | length 546.6
  Bottom Layer w20: K3.4 150,-2090 190,-2130 T1.1
NetLS1_1: LS1.1 R3.1 | length 534.2
  Top Layer w20: R3.1 1641.54,-698.46 1687,-653 1687,-337 LS1.1
NetR6_1: R6.1 R7.2 T1.2 | length 632.4
  Top Layer w20: v1(800,-2113) R6.1@858.46,-2113 ; R6.1 R6.1@858.46,-2113 ; R7.2 859.02,-2050.45 858.46,-2051 R6.1@858.46,-2113
  Bottom Layer w20: T1.2 536,-2080 569,-2113 v1(800,-2113)
NetR8_1: R8.1 R9.2 T2.2 | length 800.7
  Top Layer w20: v1(800,-1956) 800,-1926 830,-1896 858.46,-1896 R8.1 858.46,-1726 859.02,-1725.45 R9.2
  Bottom Layer w20: T2.2 574,-1730 v1(800,-1956)
NetR10_1: R10.1 R11.2 T3.2 | length 788.9
  Top Layer w20: R10.1 741.54,-1377 776.54,-1377 859.02,-1294.52 R11.2 v1(800,-1250)
  Bottom Layer w20: T3.2 750,-1380 800,-1330 v1(800,-1250)
NetR15_1: R15.1 ReadyLED1.1 | length 2166.8
  Top Layer w20: R15.1 1997.17,-880.17 2010,-893 2450,-893 2499,-942 2499,-1201 2424,-1276 2424,-1515.57 2546,-1637.57 2546,-1788 2603,-1845 2730,-1845 2745,-1830 2745,-1455 ReadyLED1.1
pads on no net: IC4.16 IC4.21 IC4.23 IC4.24 IC4.25 IC4.26 IC4.27 K2.5 MOD1.8 MOD2.8

## Text inside footprints (layer, text, board x,y; h text height)
BT1: Mechanical 5 "-" at 6805.91,-1732.72 h40; Mechanical 5 "+" at 5877.44,-1734.68 h40; Top Overlay "-" at 6805.91,-1732.72 h40; Top Overlay "+" at 5877.44,-1734.68 h40
C5: Top Overlay "+" at 1970,-2537.4 h59.06 r180
C7: Top Overlay "+" at 1250,-2217.4 h59.06 r180
C8: Top Overlay "+" at 2362.6,-170 h59.06 r90
C11: Top Overlay "+" at 1087.4,-1130 h59.06 r270
C14: Top Overlay "+" at 7222.6,-1335 h59.06 r90
K1: Mechanical 6 "PCB Edge" at 280,-2915 h25.59 r270
K4: Top Overlay "6" at 8575,-1320 h50 r90; Top Overlay "5" at 8675,-1320 h50 r90; Top Overlay "2" at 8575,-1680 h50 r90; Top Overlay "1" at 8675,-1660 h50 r90
MOD1: Top Overlay "2" at 8070,-1780 h50 r90; Top Overlay "1" at 8170,-1760 h50 r90; Top Overlay "7" at 8170,-1320 h50 r90; Top Overlay "8" at 8070,-1320 h50 r90
MOD2: Top Overlay "2" at 720,-550 h50 r90; Top Overlay "1" at 820,-530 h50 r90; Top Overlay "7" at 820,-90 h50 r90; Top Overlay "8" at 720,-90 h50 r90